# Altium PCB LED_adapt.PcbDoc
Units mil, origin at the board's own origin, x right, y up, seen from the top; angles counter-clockwise.
Board outline 2063.5 x 896.44 mil, 2 copper layers (Top Layer, Bottom Layer); 4 components, 4 nets, 14 pads, 0 vias.
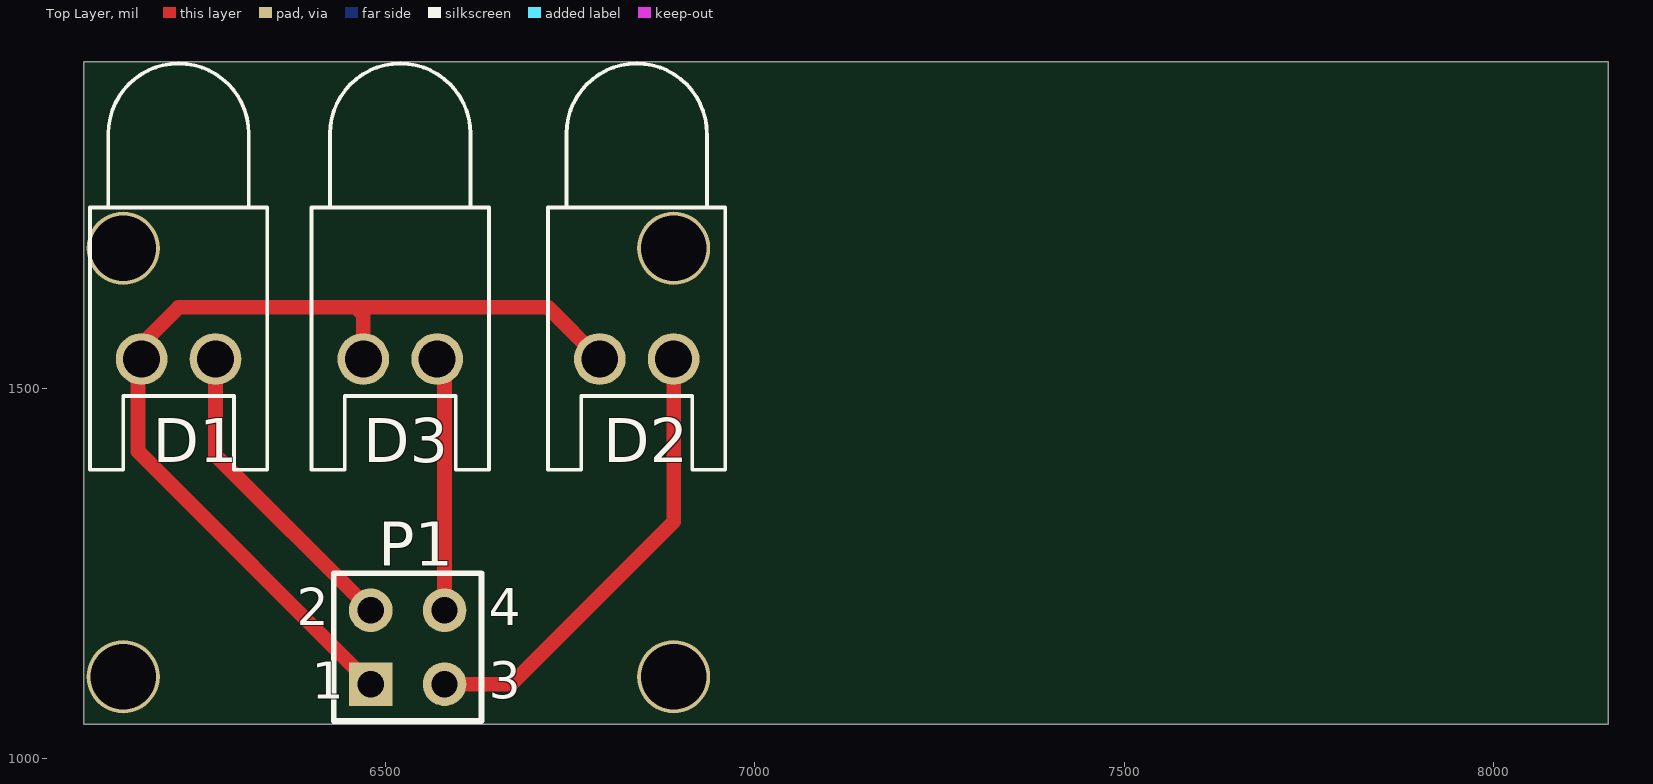
[diagram p0: Top Layer view]
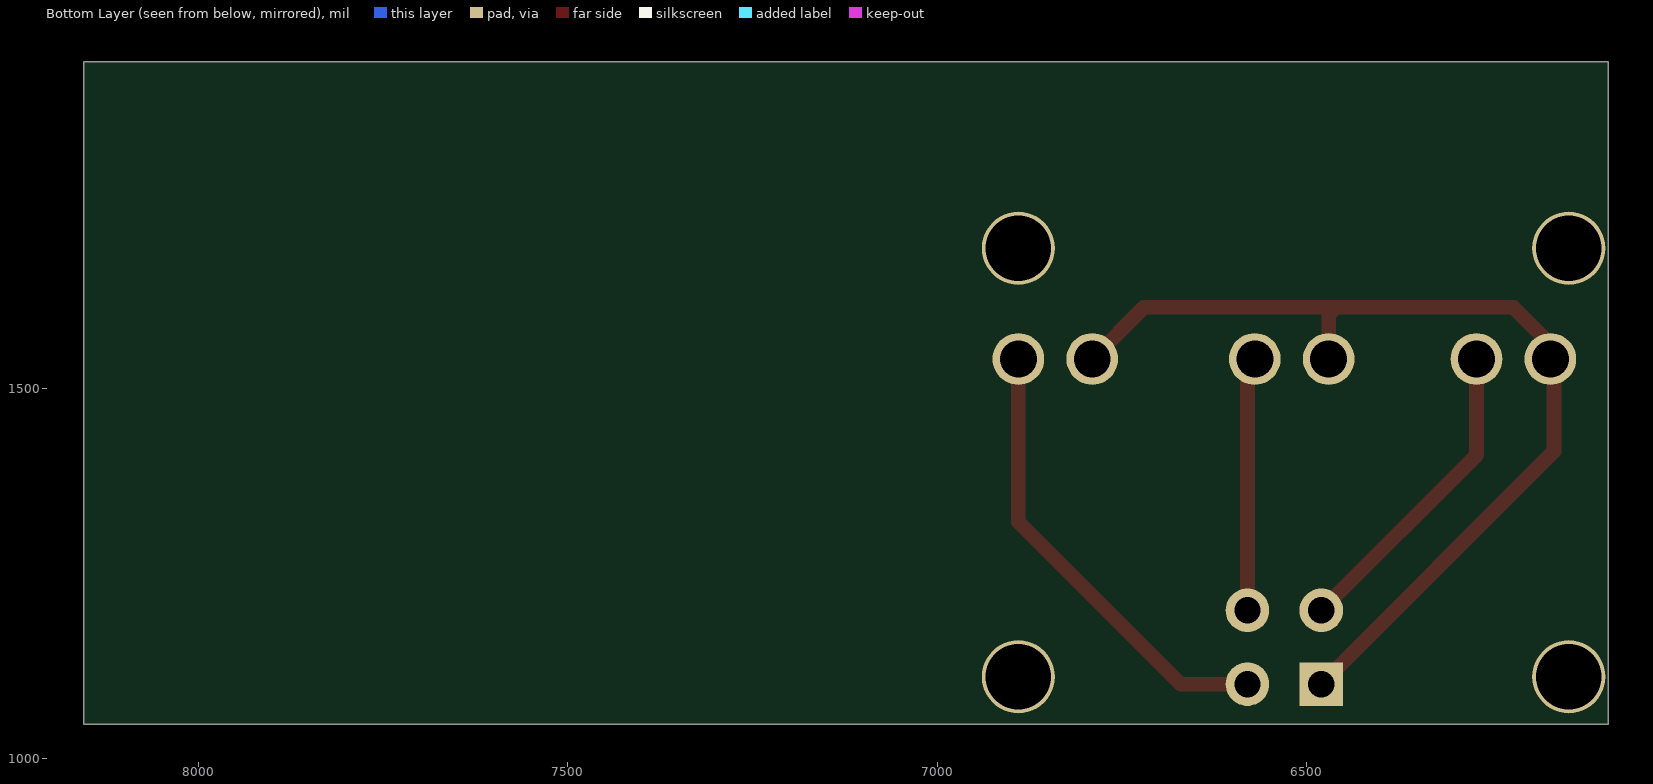
[diagram p1: Bottom Layer view, seen from below]

## Layer stack, top to bottom
Top Layer: signal copper 1.4
Dielectric: dielectric 12.6, FR-4, Dk 4.8
Bottom Layer: signal copper 1.4

## Board outline
6091.5,1046.06 8155,1046.06 8155,1942.5 6091.5,1942.5

## Design rules (kind name [scope] priority, off if disabled: settings)
Clearance [All] p1: gap=10
PolygonConnect [All] p1: connectstyle=Relief reliefconductorwidth=10 reliefentries=4 polygonreliefangle="90 Angle"
RoomDefinition LED_adapt [InComponentClass('LED_adapt')] p1: confinementstyle=ConfineIn formatcopy=TRUE lockcomponents=FALSE outline 7045,1060 8155,1060 8155,1730 7045,1730
RoutingVias [All] p1: holewidth=28 width=50 viastyle="Through Hole" minholewidth=28 minwidth=50 maxholewidth=28 maxwidth=50
SilkscreenOverComponentPads [All] p1: minsilkscreentomaskgap=10
SolderMaskExpansion [All] p1: expansion=4
Width [All] p1: maxlimit=20 minlimit=20 preferedwidth=20
27 further rules are at their usual default settings.

## Components (designator, comment, footprint, x,y, rotation, side; value= is the part's Value field where it differs from the comment)
D1 "RED" LED-0 6220,1540 r180 top
D2 "GREEN" LED-0 6840,1540 r180 top
D3 "BLUE" LED-0 6520,1540 r180 top
P1 "LED_CONN" HDR2X2 6480,1100 r0 top

## Footprints (in the part's own frame and the unit in brackets; to place one, negate y for a bottom-side part, rotate by r counter-clockwise, add the part's x,y. Pads: shape width x height; smd on the part's side, far side on the other; paste and mask are expansions set on the pad)
HDR2X2 [mm] "Connector; Header; 2x2 Position"
  rect 1.5x1.5 hole 0.9: 1(0,0)
  round 1.5 hole 0.9: 2(0,2.54) 3(2.54,0) 4(2.54,2.54)
  silkscreen extent -1.27,-1.27 3.81,3.81
LED-0 [mil] "Typical INFRARED GaAs LED; 2 Leads"
  round 70 hole 50: 1(50,0) 2(-50,0)
  silkscreen extent -120,-400 120,150

## Part data
D1 D2 D3: library part LED0, "Typical INFRARED GaAs LED"
P1: library part "Header 2X2", "Header, 2-Pin, Dual row"

## Free pads (board coordinates)
  round 99 hole 89: 4(6145,1110) 4(6145,1690) 4(6890,1110) 4(6890,1690)

## Nets (pads, with @x,y where several pads share a name; then routed paths per layer and width w, separated by ;. In a path a pad name is that pad's centre, name@x,y a point inside that pad or via, vN(x,y) a via of type N, cw(c..) or ccw(c..) an arc to the next point about the centre after c; other vN are vias at no path point)
NetD1_2: D1.2 P1.2 | length 427
  Top Layer w20: D1.2 6270,1410 P1.2
NetD2_2: D2.2 P1.3 | length 621.1
  Top Layer w20: P1.3 6670,1100 6890,1320 D2.2
NetD3_2: D3.2 P1.4 | length 344.1
  Top Layer w20: D3.2 6580,1530 P1.4
VCC: D1.1 D2.1 D3.1 P1.1 | length 1336.4
  Top Layer w20: D3.1 6470,1600 6460,1610 ; P1.1 6165,1415 6165,1535 D1.1 6170,1560 6220,1610 6460,1610 ; D2.1 6720,1610 6460,1610

## Silkscreen, mask and mechanical layers (free items; w line width, h text height)
Top Overlay:
  text "Put" at 5750,1910 h60
  text "Switch" at 5745,1825 h60
  text "Here" at 5735,1735 h60

## Text inside footprints (layer, text, board x,y; h text height)
P1: Top Overlay "3" at 6640,1080 h50; Top Overlay "4" at 6640,1180 h50; Top Overlay "2" at 6380,1180 h50; Top Overlay "1" at 6400,1080 h50